# EAGLE board PCB Capacitor (EAGLE 9.6.2)
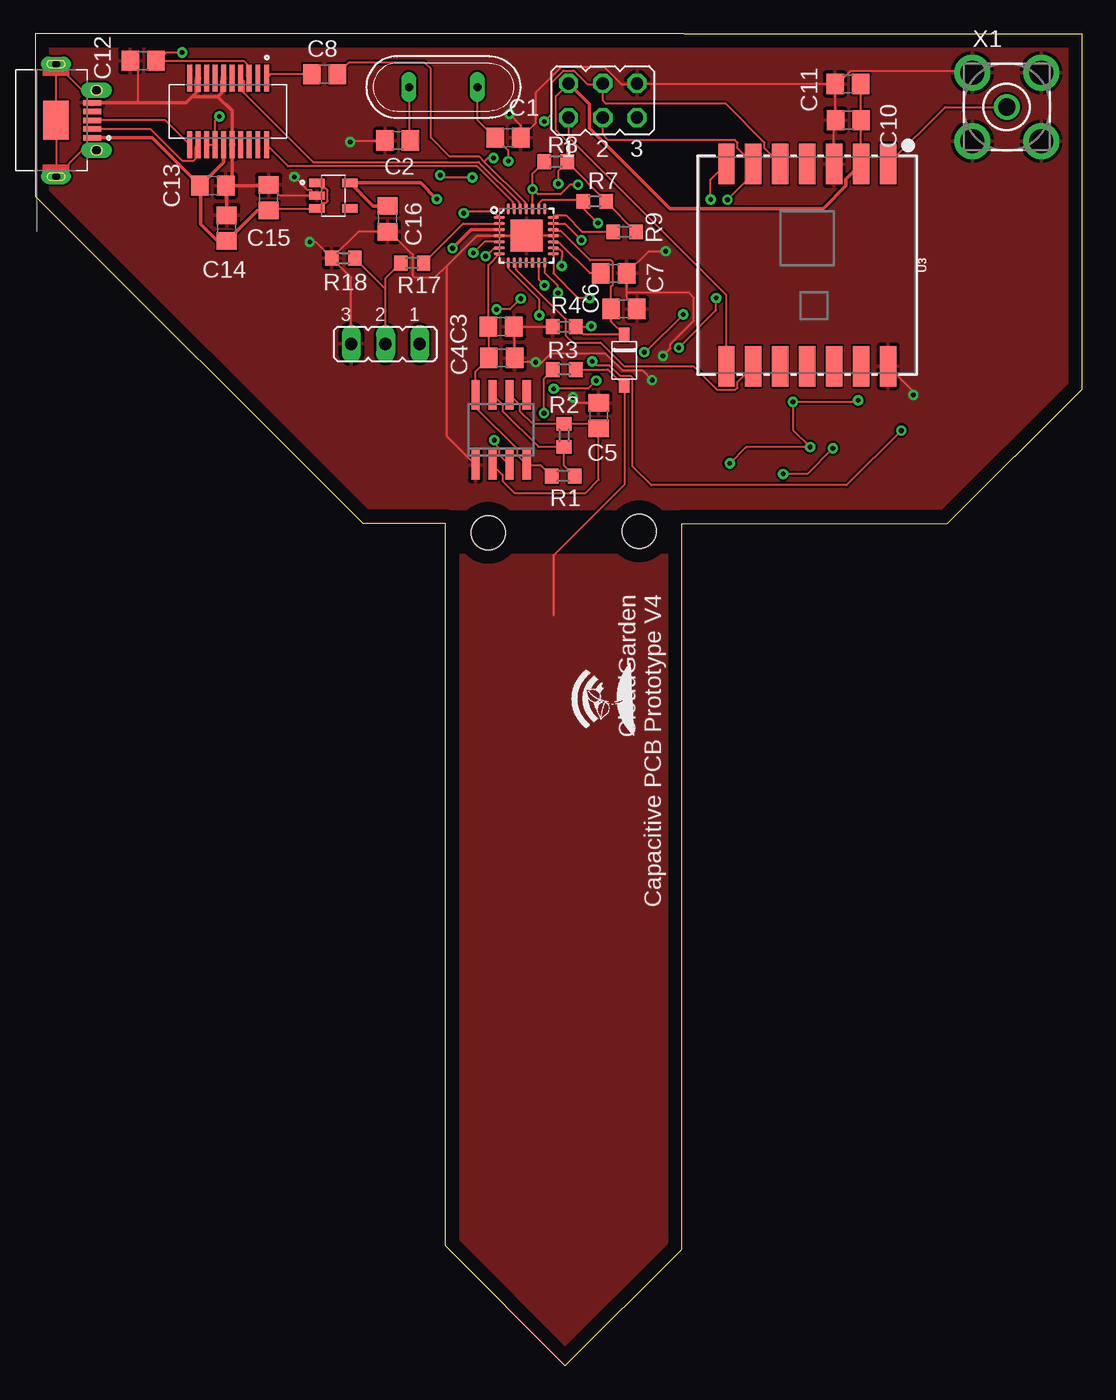
[diagram p0: board, top side]
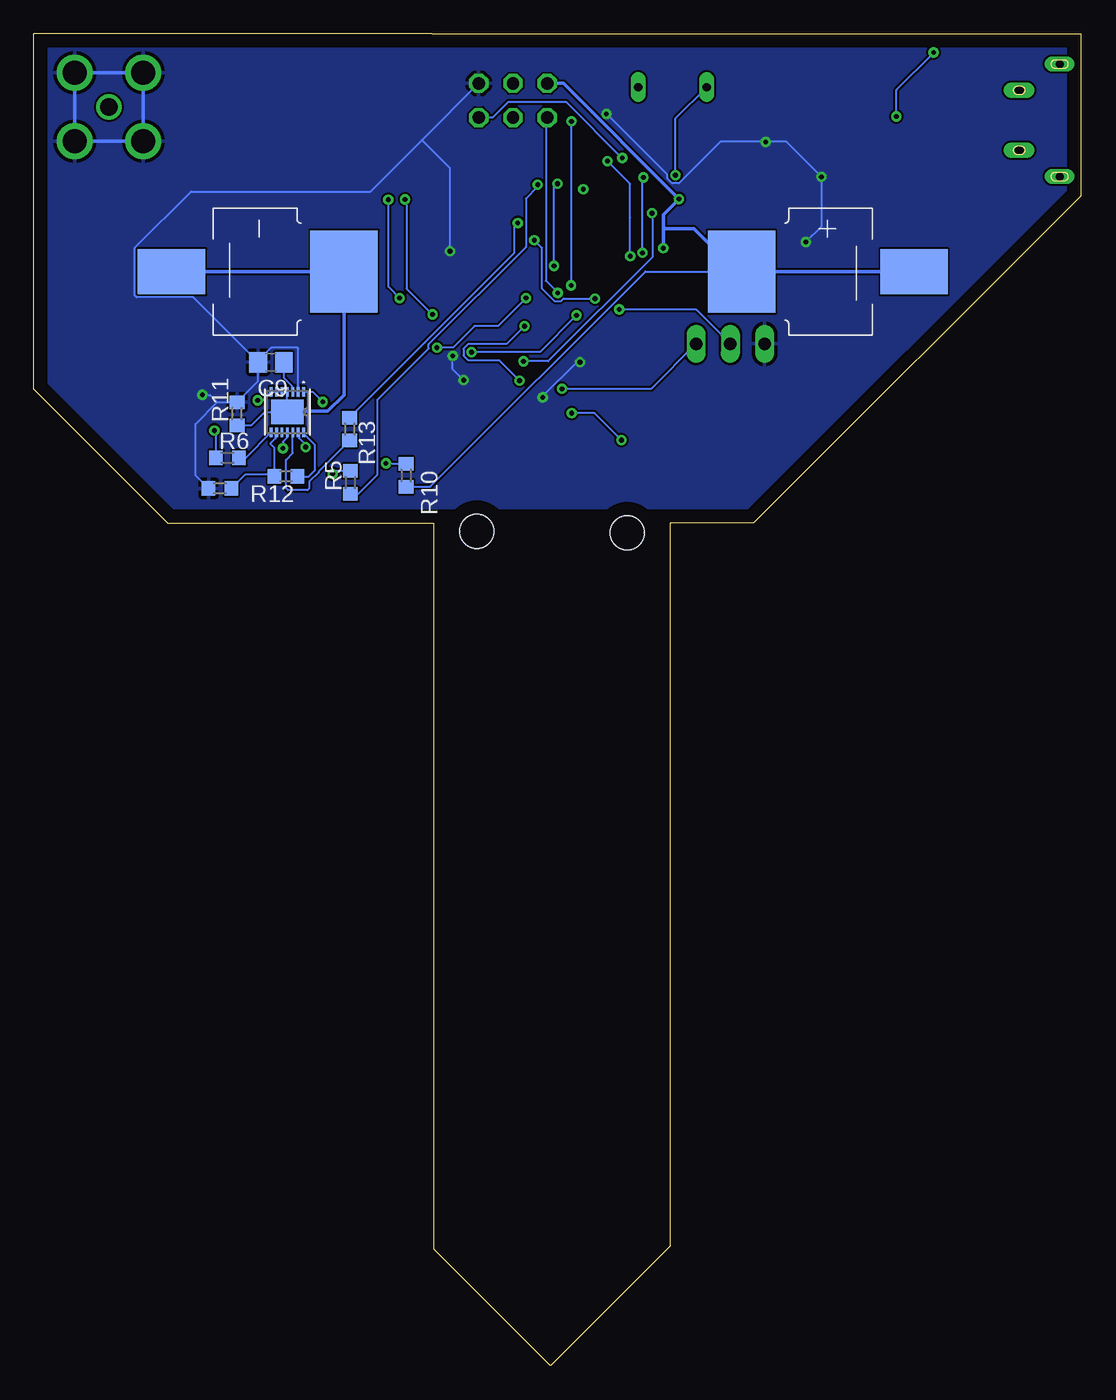
[diagram p1: board, bottom side, seen from below]

Size 77.67 x 98.83 mm. Coordinates in mm from the lower left corner, seen from the top.
Outline: 30.58,98.83 30.58,98.83
Outline: 48.13,98.83 48.13,98.83
Outline: 48.13,98.83 30.58,98.83
Outline: 30.58,98.83 0,98.83 0,86.79 24.28,62.51 30.43,62.51 30.43,8.89 39.32,0 47.98,8.66 47.98,62.48 67.69,62.48 77.67,72.47 77.67,98.83 48.13,98.83
Copper layers (1*16): Top 0.035mm / dielectric 1.5mm / Bottom 0.035mm
Design rules "default": minimum track width 6mil, minimum drill 0.35mm, track to track 6mil, track to pad 6mil, pad to pad 6mil, via to via 6mil, smd to smd 6mil, copper to edge 40mil, drill to drill 6mil, minimum pad ring 10mil, minimum via ring 8mil, stop-mask expansion 4mil, vias tented up to drill 0mil, thermal gap 10mil
Holes 2.54 mm at 33.63,61.8 44.81,61.93

## Footprints (pad centres in the part's own frame; a part is rotated, then mirrored left to right if it is on the bottom)
C0805 = smd 1.3 x 1.5: 1 -0.95,0; 2 0.95,0
SOD-123 = smd 0.762 x 1.016: A 0,-1.905; C 0,1.905
SO08 = smd 0.6 x 2.2: 1 -1.905,-2.6; 2 -0.635,-2.6; 3 0.635,-2.6; 4 1.905,-2.6; 5 1.905,2.6; 6 0.635,2.6; 7 -0.635,2.6; 8 -1.905,2.6
0475900001 = smd 0.4 x 1.35: 1 1.3,2.675; 2 0.65,2.675; 3 0,2.675; 4 -0.65,2.675; 5 -1.3,2.675 | drill 0.65 pad 0.85 long: SH1 -2.225,3; SH2 2.225,3 | drill 0.6 pad 0.8 long: SH3 -4.175,0; SH4 4.175,0 | smd 2.9 x 1.9: SH5 0,0
JP2 = drill 0.914 long: 1 -2.54,0; 2 0,0; 3 2.54,0
JP3Q = drill 0.914 octagon: 1 -2.54,-1.27; 2 -2.54,1.27; 3 0,-1.27; 4 0,1.27; 5 2.54,-1.27; 6 2.54,1.27
QS = drill 0.61 long: 1 -2.54,0; 2 2.54,0
R0603 = smd 1 x 1.1: 1 -0.85,0; 2 0.85,0
SOT-23-5 = smd 1.16 x 0.61: 1 -1.23,0.95; 2 -1.23,0; 3 -1.23,-0.95; 4 1.23,-0.95; 5 1.23,0.95
VQFN-28 = smd 0.82 x 0.24: 1 -2,1.35; 2 -2,0.9; 3 -2,0.45; 4 -2,0; 5 -2,-0.45; 6 -2,-0.9; 7 -2,-1.35; 15 2,-1.35; 16 2,-0.9; 17 2,-0.45; 18 2,0; 19 2,0.45; 20 2,0.9; 21 2,1.35 | smd 0.24 x 0.82: 8 -1.35,-2; 9 -0.9,-2; 10 -0.45,-2; 11 0,-2; 12 0.45,-2; 13 0.9,-2; 14 1.35,-2; 22 1.35,2; 23 0.9,2; 24 0.45,2; 25 0,2; 26 -0.45,2; 27 -0.9,2; 28 -1.35,2 | smd 2.4 x 2.4: PAD 0,0
21-0137_T1433-2C_MXM = smd 0.711 x 0.203: 1 -1.499,1.2; 2 -1.499,0.8; 3 -1.499,0.4; 4 -1.499,0; 5 -1.499,-0.4; 6 -1.499,-0.8; 7 -1.499,-1.2; 8 1.499,-1.2; 9 1.499,-0.8; 10 1.499,-0.4; 11 1.499,0; 12 1.499,0.4; 13 1.499,0.8; 14 1.499,1.2 | smd 1.803 x 2.388: 15 0,0
RFM69CW-XXXS2 = smd 3 x 1.2: 1 -7.5,6; 2 -7.5,4; 3 -7.5,2; 4 -7.5,0; 5 -7.5,-2; 6 -7.5,-4; 7 -7.5,-6; 8 7.5,-6; 9 7.5,-4; 10 7.5,-2; 11 7.5,0; 12 7.5,2; 13 7.5,4; 14 7.5,6
SOP63P599X175-20N = smd 1.97 x 0.41: 1 -2.47,2.857; 2 -2.47,2.223; 3 -2.47,1.587; 4 -2.47,0.953; 5 -2.47,0.318; 6 -2.47,-0.318; 7 -2.47,-0.953; 8 -2.47,-1.587; 9 -2.47,-2.223; 10 -2.47,-2.857; 11 2.47,-2.857; 12 2.47,-2.223; 13 2.47,-1.587; 14 2.47,-0.953; 15 2.47,-0.318; 16 2.47,0.318; 17 2.47,0.953; 18 2.47,1.587; 19 2.47,2.223; 20 2.47,2.857
KEYESTONE_53_A_TYPE = smd 6.1 x 5: P$1 0,0; P$3 0,-29.5 | smd 3.34 x 5: P$2 0,12.8; P$4 0,-42.3
BU-SMA-V = drill 1.27: 1 0,0 | drill 1.778: 2 -2.55,2.55; 3 2.55,2.55; 4 2.55,-2.55; 5 -2.55,-2.55

## Placement (x,y rotation side)
C1  22p  [C0805]  35.08,91.11 0 top
C2  22p  [C0805]  26.9,90.91 180 top
C3  140n  [C0805]  34.57,77.09 0 top
C4  120n  [C0805]  34.62,74.78 0 top
C5  660p  [C0805]  41.81,70.48 90 top
C6  1u  [C0805]  43.69,78.41 0 top
C7  0.1u  [C0805]  42.93,81.05 0 top
C8  0.1u  [C0805]  21.46,95.83 0 top
C9  0.47u  [C0805]  60.07,74.45 180 bottom
C10  10u  [C0805]  60.33,92.41 180 top
C11  0.1u  [C0805]  60.3,95.1 180 top
C12  0.1u  [C0805]  8,96.82 180 top
C13  10u  [C0805]  13.18,87.55 0 top
C14  0.1u  [C0805]  14.2,84.4 90 top
C15  1u  [C0805]  17.32,86.66 90 top
C16  1u  [C0805]  26.14,85.09 270 top
D11  DIODE_SCHOTTKY_CMMSH2-40  [SOD-123]  43.71,74.6 0 top
IC2  NE555D  [SO08]  34.57,69.44 0 top
J1  0475900001  [0475900001]  1.55,92.41 270 top
JP1  [JP2]  25.98,75.82 180 top
JP2  [JP3Q]  42.11,93.88 0 top
Q2  8 MHz  [QS]  30.28,94.87 0 top
R1  330  [R0603]  39.17,66.01 180 top
R2  1600  [R0603]  39.24,69.04 270 top
R3  10k  [R0603]  39.27,73.91 0 top
R4  1M  [R0603]  39.24,77.09 0 top
R5  150  [R0603]  54.18,65.53 90 bottom
R6  1k  [R0603]  63.3,67.36 0 bottom
R7  OPT  [R0603]  41.53,86.39 0 top
R8  OPT  [R0603]  38.63,89.33 0 top
R9  100  [R0603]  43.74,84.12 0 top
R10  10  [R0603]  50.04,66.07 90 bottom
R11  0.1  [R0603]  62.59,70.64 90 bottom
R12  10k  [R0603]  58.95,65.99 180 bottom
R13  150  [R0603]  54.23,69.49 270 bottom
R17  10k  [R0603]  27.97,81.81 0 top
R18  THERM  [R0603]  22.86,82.17 0 top
R19  THERM  [R0603]  63.86,65.1 180 bottom
TLV75533PDBVR  LP2985-33DBVR  [SOT-23-5]  22.12,86.82 0 top
U1  ATMEGA328P_VQFNVQFN  [VQFN-28]  36.45,83.85 0 top
U2  MAX17201G+T  [21-0137_T1433-2C_MXM]  58.85,70.76 270 bottom
U3  915MHz  [RFM69CW-XXXS2]  57.28,81.66 270 top
U4  FT231XS-R  [SOP63P599X175-20N]  14.3,93.07 270 top
U$1  KEYESTONE_53A_TYPE  [KEYESTONE_53_A_TYPE]  25.15,81.18 270 bottom
X1  BU-SMA-V  [BU-SMA-V]  72.09,93.4 0 top

## Library data of the parts
C1-C16 = rcl; SPICEPREFIX: C
D11 = diode
IC2 = linear
J1 = USB connector; CREATED_BY: PCBLayout.com; DIGIKEY_PARTNO: WM17144TR-ND; MANUFACTURER: Molex; MPN: 0475900001
JP1 JP2 = jumper
Q2 = special
R1-R13 R17-R19 = rcl; SPICEPREFIX: R
TLV75533PDBVR = IC; CREATED_BY: PCBLayout.com; DIGIKEY_PART_NUMBER: 296-18476-2-ND; MANUFACTURER: Texas Instruments; MPN: LP2985-33DBVR; PACKAGE: SOT-23-5
U1 = SparkFun-IC-Microcontroller
U2 = MAX17201G+T; BUILT_BY: UL_Team_Molly; COPYRIGHT: Copyright (C) 2018 Accelerated Designs. All rights reserved; MANUFACTURER_PART_NUMBER: MAX17201G+T; REVISION: 1; SOURCELIBRARY: Maxim_2018-10-24; VENDOR: Maxim Integrated Products
U3 = SparkFun-RF; PROD_ID: IC-11996
U4 = FT231XS-R; DESCRIPTION: USB Bridge, USB to UART USB 2.0 UART Interface 20-SSOP; DIGI-KEY_PART_NUMBER: 768-1129-1-ND; MF: FTDI,; MP: FT231XS-R; PACKAGE: SSOP-20 FTDI; PURCHASE-URL: https://pricing.snapeda.com/search/part/FT231XS-R/?ref=eda
U$1 = battery-holders
X1 = con-coax; OC_FARNELL: unknown; OC_NEWARK: unknown

## Nets
5V: C13.1 C14.1 C15.1 J1.1 TLV75533PDBVR.1 TLV75533PDBVR.3 U4.15
ALERT: R6.1 U1.1
ANT: U3.1 X1.1
CAP: D11.A R3.2
DTR: C8.1 U4.1
FTDR: C12.1 U4.3 U4.13 U4.14
GND: C1.2 C2.2 C3.2 C4.2 C5.2 C6.2 C7.2 C9.2 C10.2 C11.2 C12.2 C13.2 C14.2 C15.2 C16.2 IC2.1 J1.5 JP1.3 JP2.6 R4.1 R11.2 R18.1 R19.2 TLV75533PDBVR.2 U1.4 U1.18 U1.PAD U2.2 U3.3 U3.14 U4.6 U4.9 U4.16 X1.2 X1.3 X1.4 X1.5
MISO: JP2.1 U1.14 U3.8
MOSI: JP2.4 U1.13 U3.5
N$1: R12.1 U2.14
N$2: IC2.7 R1.1 R2.2
N$3: C5.1 IC2.2 IC2.6 R2.1
N$4: R11.1 U2.4 U2.15 U$1.P$3 U$1.P$4
N$5: C9.1 U2.3
N$6: C1.1 Q2.2 U1.6
N$7: C2.1 Q2.1 U1.5
N$8: J1.2 U4.12
N$9: IC2.3 R3.1
N$10: J1.3 U4.11
N$11: C7.1 U1.17
N$12: R10.2 U2.1 U2.5 U2.6 U2.7 U2.13
N$13: R12.2 R19.1 U2.9
N$14: R6.2 U2.8
N$15: R13.2 U2.12
N$16: R5.2 U2.11
RDY: U1.9 U3.9
RESET: C8.2 JP2.5 U1.25
RXI: U1.26 U4.4
SCK: JP2.3 U1.15 U3.6
SCL: R5.1 R8.1 U1.24
SDA: R7.1 R13.1 U1.23
SHIELD: J1.SH1 J1.SH2 J1.SH3 J1.SH4 J1.SH5
SOILI: C3.1 C4.1 IC2.4 IC2.8 R1.2 U1.7
SOILO: C6.1 D11.C JP1.1 R4.2 U1.19
SS: U1.8 U3.7
THERMI: R17.2 U1.2
THERMO: JP1.2 R17.1 R18.2 U1.20
TXO: U1.27 U4.20
VIN: C10.1 C11.1 C16.1 JP2.2 R7.2 R8.2 R9.2 R10.1 TLV75533PDBVR.5 U1.3 U1.16 U3.2 U$1.P$1 U$1.P$2
VREAD: R9.1 U1.21

## Tracks (layer width: path | path; a pad name or v marks a point on that pad's centre or on a via)
5V
  Top 0.152: C15.1 17.48,85.87 TLV75533PDBVR.3 21.31,86.28 21.57,86.28 21.7,86.42 21.7,87.22 21.57,87.35 21.31,87.35 TLV75533PDBVR.1
  Top 0.254: J1.1 8.68,91.11 C13.1 | C13.1 13.98,89.3 U4.15 | C13.1 12.29,87.49 12.29,84.68 13.52,83.45 C14.1 16.46,85.72 C15.1
ALERT  (via drill 0.35)
  Top 0.152: v64.26,69.39 60.2,65.33 45.72,65.33 44.32,66.73 44.32,73.3 44.19,73.43 43.41,73.43 42.62,74.22 41.63,74.22 v41.33,74.52 | v31.8,85.52 31.9,85.62 34.02,85.62 U1.1
  Bottom 0.152: v31.8,85.52 31.78,85.5 31.78,82.25 39.5,74.52 v41.33,74.52 | R6.1 64.15,69.28 v64.26,69.39
ANT
  Top 0.152: U3.1 67.51,93.4 X1.1
CAP
  Top 0.152: R3.2 42.49,73.91 D11.A 43.71,65.38 38.46,60.12 38.46,55.68
  pour Top: 29.16,60.17 29.31,60.17 49.48,60.17 49.48,-1.32 29.16,-1.32
DTR
  Top 0.152: C8.1 17.46,95.83 U4.1
FTDR  (via drill 0.35)
  Top 0.152: U4.3 15.69,95.74 15.69,96.6 15.46,96.83 9.09,96.83 | C12.1 9.09,96.83 | U4.13 U4.14 13.35,92.37 v13.67,92.68 | v10.9,97.44 9.71,97.44 9.09,96.83
  Bottom 0.152: v13.67,92.68 13.67,94.67 v10.9,97.44
GND  (via drill 0.35)
  Top 0.152: U3.3 59.28,92.31 C10.2 59.38,95.07 C11.2 | C11.2 59.53,95.1 60.51,96.08 69.4,96.08 X1.2 | C15.2 18.12,86.82 TLV75533PDBVR.2 20.48,87.23 20.22,87.23 19.24,88.21 v19.23,88.21 | C12.2 7.62,96.26 7.62,93.71 | 43.88,79.63 C7.2 45.53,82.7 v46.79,82.7 | 43.88,79.63 43.88,79.17 C6.2 | 30.56,81.63 29.69,80.76 28.15,80.76 28.01,80.89 28.01,82.44 26.31,84.14 C16.2 23.98,84.14 R18.1 | 30.56,81.63 32.77,83.85 U1.4 U1.PAD U1.18 | v23.37,90.81 23.47,90.91 C2.2 | C11.2 44.7,95.1 | 44.7,95.1 JP2.6 | 44.7,95.1 43.49,95.1 42.2,96.39 39.06,96.39 37.16,94.5 37.16,92.25 C1.2 36.03,92.04 v35.18,92.88 | C3.2 35.61,77.09 | 35.61,77.09 R4.1 | IC2.1 30.56,68.95 30.56,81.63 | C5.2 40.33,71.44 v39.9,71.86 | 35.61,77.09 35.57,77.05 C4.2 35.88,74.47 v37.13,74.47 37.6,74.47 38.26,75.13 42.29,75.13 43.56,73.86 45.04,73.86 v45.77,73.13 | v46.58,74.93 47.15,75.49 47.15,75.79 48.9,77.54 48.9,79.22 48.49,79.63 43.88,79.63 | U3.14 65.15,72.29 v65.15,72.03 | R18.1 20.79,83.39 v20.37,83.39 | R18.1 23.44,80.74 JP1.3
  Top 0.254: U4.9 11.93,95.39 11.93,94.45 11.65,94.17 | J1.5 7.62,93.71 11.19,93.71 11.65,94.17 | U4.6 13.83,95.39 13.83,94.45 13.55,94.17 | 11.65,94.17 13.55,94.17 | 13.55,94.17 14.62,93.1 U4.16 14.62,88.04 C13.2 14.22,87.55 | 14.22,87.55 17.26,87.55 C15.2 | C14.2 14.2,87.53 14.22,87.55
  Bottom 0.152: 64.05,71.49 65.66,69.88 65.66,66.05 R19.2 | 64.05,71.49 R11.2 61.02,73.05 C9.2 | C9.2 65.85,79.28 70.04,79.28 70.17,79.41 70.17,82.94 66,87.12 52.68,87.12 48.87,90.93 | 48.87,90.93 JP2.6 | U2.2 58.05,75.48 58.1,75.53 60.04,75.53 61.02,74.55 C9.2 | v20.37,83.39 19.23,84.53 v19.23,88.21 21.82,90.81 v23.37,90.81 26.73,90.81 29.8,87.73 30.3,87.73 30.66,88.09 30.66,88.35 v35.18,92.88 | v39.9,71.86 39.9,71.93 37.36,74.47 v37.13,74.47 | v45.77,73.13 46.58,73.94 v46.58,74.93 | v65.15,72.03 64.59,72.03 64.05,71.49 | v46.79,82.7 46.79,88.85 48.87,90.93
  Bottom 0.254: X1.5 X1.2 X1.3 X1.4 X1.5
  pour Top: -0.71,99.72 78.54,99.72 78.54,63.53 -0.76,63.53 -0.76,99.7
  pour Bottom: -0.69,99.7 78.59,99.7 78.59,63.65 -0.71,63.65 -0.71,99.7
MISO  (via drill 0.35)
  Top 0.152: U3.8 51.28,79.44 39.57,91.15 JP2.1 | v38.79,79.6 38.79,80.12 37.8,81.11 U1.14
  Bottom 0.152: JP2.1 39.67,92.51 39.67,80.49 v38.79,79.6
MOSI  (via drill 0.35)
  Top 0.152: U3.5 54.11,90.33 54.11,90.76 51.24,93.62 42.36,93.62 42.11,93.87 42.11,95.07 | 42.11,95.07 JP2.4 | U1.13 37.35,80.61 v37.8,80.16 | v37.77,92.33 38.33,92.89 38.33,95.23 39.18,96.09 39.96,96.09 40.98,95.07 42.11,95.07
  Bottom 0.152: v37.77,92.33 37.8,92.3 v37.8,80.16
N$1
  Bottom 0.152: U2.14 57.65,69.16 56.81,68.32 56.81,66.45 57.27,65.99 R12.1
N$2
  Top 0.152: R1.1 39.24,66.79 R2.2 37.34,68.19 34.68,70.85 34.68,71.3 IC2.7
N$3
  Top 0.152: IC2.6 35.95,71.3 35.95,70.85 36.91,69.89 R2.1 41.46,69.89 C5.1 41.81,65.75 40.82,64.76 35.57,64.76 34.68,65.65 34.68,66.1 IC2.2
N$4
  Bottom 0.152: R11.1 61.51,69.79 60.53,70.76 U2.15 U2.4
  Bottom 0.254: U2.15 58.8,70.82 55.86,70.82 54.65,72.03 U$1.P$3 U$1.P$4
N$5
  Bottom 0.152: U2.3 58.52,72.33 58.52,72.71 59.12,73.31 C9.1
N$6  (via drill 0.35)
  Top 0.152: Q2.2 32.82,92.42 C1.1 35.1,90.13 v35.1,89.38 | U1.6 34.35,82.84 33.98,82.84 33.46,82.32 v33.42,82.32
  Bottom 0.152: v33.42,82.32 33.42,85.19 33.42,87.7 v35.1,89.38
N$7  (via drill 0.35)
  Top 0.152: Q2.1 27.74,91.02 C2.1 | U1.5 33.33,83.4 v32.51,82.58 | v32.44,88.16 30.23,88.16 v30.05,88.34
  Bottom 0.152: v32.51,82.58 32.51,88.09 v32.44,88.16 | v30.05,88.34 30.05,92.56 Q2.1
N$8
  Top 0.152: U4.12 11.88,90.39 11.88,89.53 11.73,89.38 10.92,89.38 8.55,91.76 J1.2
N$9  (via drill 0.35)
  Top 0.152: IC2.3 34.46,67.59 34.46,68.04 34.06,68.44 v34.06,68.68 | v37.74,70.69 37.74,73.24 R3.1
  Bottom 0.152: v34.06,68.68 36.07,70.69 v37.74,70.69
N$10
  Top 0.152: U4.11 9.63,92.41 J1.3
N$11
  Top 0.152: U1.17 38.55,83.29 38.92,83.29 41.16,81.05 C7.1
N$12  (via drill 0.35)
  Top 0.152: v51.54,66.95 52.74,68.15 v57.5,68.15 56.23,69.43 v56.23,71.52 60.96,71.52 v61.06,71.63
  Bottom 0.152: U2.13 57.98,69.2 57.98,68.82 57.5,68.33 v57.5,68.15 | v51.54,66.95 50.08,66.95 R10.2 | U2.1 56.97,72.26 v56.23,71.52 | U2.5 U2.6 U2.7 60.69,71.63 v61.06,71.63
N$13
  Bottom 0.152: U2.9 59.72,69.2 59.72,68.82 60.12,68.42 59.8,68.1 R12.2 59.96,66.14 61.96,66.14 R19.1
N$14
  Bottom 0.152: R6.2 61.96,67.36 U2.8
N$15
  Bottom 0.152: U2.12 58.45,67.72 58.96,67.22 58.96,65.12 58.8,64.96 57.36,64.96 57.2,65.12 57.2,65.62 56.5,66.32 56.5,66.37 R13.2
N$16  (via drill 0.35)
  Top 0.152: v59.18,68.07 57.28,66.17 v55.5,66.17
  Bottom 0.152: U2.11 58.92,69.2 58.92,68.82 59.18,68.56 v59.18,68.07 | R5.2 55.28,66.38 v55.5,66.17
RDY
  Top 0.152: U1.9 35.65,81.74 35.65,81.38 39.36,77.66 39.36,76.44 39.89,75.92 41.93,75.92 43.69,74.16 48.85,74.16 50.58,72.43 51.97,72.43 52.11,72.57 52.11,72.99 U3.9
RESET  (via drill 0.35)
  Top 0.152: U1.25 36.35,85.95 36.35,86.32 33.32,89.35 | 33.32,89.35 32.95,89.71 30.76,89.71 29.36,91.11 29.36,96.22 28.91,96.67 23.24,96.67 C8.2 | 33.32,89.35 33.58,89.61 v34.01,89.61
  Bottom 0.152: JP2.5 43.62,92.61 42.48,93.75 38.15,93.75 v34.01,89.61
RXI
  Top 0.152: U4.4 15.45,95.33 15.45,94.47 20.62,89.3 32.91,89.3 35.9,86.32 35.9,85.95 U1.26
SCK  (via drill 0.35)
  Top 0.152: JP2.3 42.11,91.33 42.51,90.93 51.93,90.93 52.11,90.76 52.11,90.33 U3.6 53.28,88.43 v51.36,86.51 | v41.15,79.22 40.27,79.22 38.45,81.05 U1.15 | v47.75,75.54 50.52,78.31 v50.52,79.22
  Bottom 0.152: v41.15,79.22 43.23,77.14 44.98,77.14 46.58,75.54 v47.75,75.54 | v50.52,79.22 51.36,80.06 v51.36,86.51
SCL  (via drill 0.35)
  Top 0.152: U1.24 v36.9,87.3 36.9,87.33 | 36.9,87.33 36.9,88.45 R8.1 | v40.28,87.62 39.69,87.62 38.99,86.92 37.31,86.92 36.9,87.33
  Bottom 0.152: v40.28,87.62 40.28,87.47 41.15,86.61 41.15,83.01 48.36,75.79 48.36,75.48 52.18,71.65 52.18,66.09 53.59,64.68 R5.1
SDA  (via drill 0.35)
  Top 0.152: U1.23 37.35,86.21 37.62,86.48 40.58,86.48 R7.1 40.68,85.86 v41.76,84.79
  Bottom 0.152: v41.76,84.79 42.01,84.53 42.01,82.57 48.67,75.92 48.67,75.91 R13.1
SHIELD
  Top 0.152: J1.SH1 3.5,94.63 J1.SH3 J1.SH5 J1.SH4 3.5,90.18 J1.SH2
SOILI
  Top 0.152: R1.2 37.49,66.84 IC2.4 35.73,67.59 35.73,68.04 32.66,71.11 IC2.8 32.66,73.77 C4.1 33.67,77.04 C3.1 33.62,81.67 U1.7
SOILO  (via drill 0.35)
  Top 0.152: U1.19 38.55,84.19 38.99,84.19 41.16,82.03 42.72,82.03 42.85,81.9 42.85,80.21 42.74,80.09 C6.1 42.74,77.48 D11.C 40.68,76.51 R4.2 41.2,77.09 v41.25,77.14 | v41.63,73.1 41.02,72.49 v38.48,72.49
  Bottom 0.152: v41.25,77.14 42.57,75.82 45.44,75.82 45.79,75.46 45.79,74.96 45.44,74.6 43.13,74.6 v41.63,73.1 | v38.48,72.49 31.85,72.49 JP1.1
SS  (via drill 0.35)
  Top 0.152: U1.8 35.1,81.43 37.4,79.13 v37.4,77.93 | v50.11,86.54 50.11,88 U3.7 | v48.08,78 45.29,75.21 v45.19,75.21
  Bottom 0.152: v37.4,77.93 40.12,75.21 v45.19,75.21 | v48.08,78 50.01,79.93 50.01,86.44 v50.11,86.54
THERMI
  Top 0.152: R17.2 31.75,84.75 U1.2
THERMO  (via drill 0.35)
  Top 0.152: JP1.2 25.98,79.9 | 25.98,79.9 25.98,80.68 R17.1 | U1.20 39.3,84.75 v40.53,83.52 | v36.03,79.18 35.22,78.38 v34.23,78.38 | R18.2 25.98,79.9
  Bottom 0.152: v40.53,83.52 39.98,82.97 39.98,79.94 39.04,79 38.53,79 38.35,79.18 v36.03,79.18 | v34.23,78.38 28.54,78.38 JP1.2
TXO
  Top 0.152: U1.27 35.45,85.95 35.45,86.32 32.77,89 18.76,89 U4.20
VIN  (via drill 0.35)
  Top 0.152: U3.2 C10.1 61.28,95.07 C11.1 | R8.2 39.48,89.28 R7.2 42.38,86.33 R9.2 | R8.2 39.48,90.81 38.63,91.66 38.63,94.21 JP2.2 | U1.16 38.55,82.84 38.92,82.84 39.09,82.68 39.09,82.32 39.07,82.3 v39.07,81.61 | v38.81,87.71 38.81,88.66 R8.2
  Top 0.254: v29.79,86.56 28.59,87.77 TLV75533PDBVR.5 25.08,86.04 C16.1 | v30.96,82.92 32.34,84.3 U1.3 | JP2.2 41.12,93.6 41.12,91.82 47.09,85.86 58.47,85.86 60.16,87.55 60.16,88.04 U3.2
  Bottom 0.152: v39.07,81.61 39.07,87.45 v38.81,87.71 | 25.35,81.18 32.28,81.18 48.25,65.22 R10.1
  Bottom 0.254: 30.96,84.35 30.96,85.4 v29.79,86.56 38.38,95.15 JP2.2 | 30.96,84.35 v30.96,82.92 | U$1.P$2 U$1.P$1 25.35,81.18 25.5,81.18 28.68,84.35 30.96,84.35
VREAD
  Top 0.152: U1.21 38.58,85.32 39.43,85.32 40.62,84.13 R9.1

## Text on the board
tPlace: CloudGarden / Capacitive PCB Prototype V4